# EAGLE board Tilty Omni (EAGLE 6.5.0)
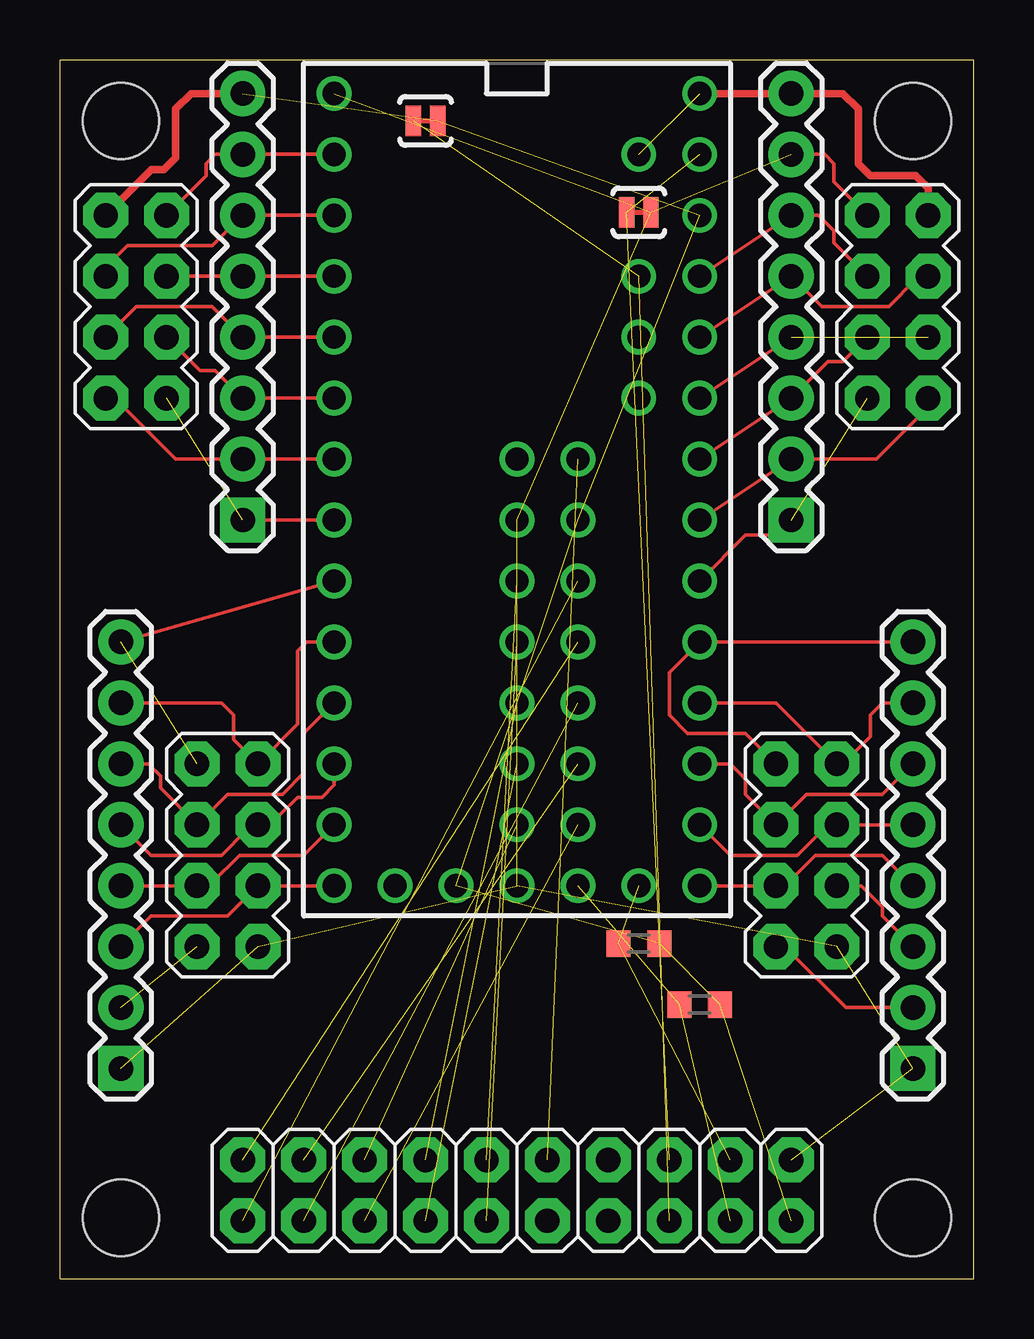
[diagram p0: board, top side]

Size 38.1 x 50.8 mm. Coordinates in mm from the lower left corner, seen from the top.
Outline: 0,0 38.1,0 38.1,50.8 0,50.8 0,0
Copper layers (1*16): Top 0.0356mm / dielectric 1.5011mm / Bottom 0.0356mm
Design rules "LaenPCBOrder": minimum track width 6mil, minimum drill 13mil, track to track 6mil, track to pad 6mil, pad to pad 6mil, via to via 6mil, smd to smd 6mil, copper to edge 15mil, drill to drill 6mil, minimum pad ring 7mil, minimum via ring 7mil, stop-mask expansion 4mil, vias tented up to drill 0mil, thermal gap 10mil
Holes 3.17 mm at 35.56,48.26 35.56,2.54 2.54,2.54 2.54,48.26

## Footprints (pad centres in the part's own frame; a part is rotated, then mirrored left to right if it is on the bottom)
1X08 = drill 1.016 pad 1.88 square: 1 0,0 | drill 1.016 pad 1.88: 2 2.54,0; 3 5.08,0; 4 7.62,0; 5 10.16,0; 6 12.7,0; 7 15.24,0; 8 17.78,0
2X4 = drill 1.016 pad 1.88 octagon: 1 -3.81,-1.27; 2 -3.81,1.27; 3 -1.27,-1.27; 4 -1.27,1.27; 5 1.27,-1.27; 6 1.27,1.27; 7 3.81,-1.27; 8 3.81,1.27
2X10 = drill 1.016 pad 1.88 octagon: 1 -11.43,-1.27; 2 -11.43,1.27; 3 -8.89,-1.27; 4 -8.89,1.27; 5 -6.35,-1.27; 6 -6.35,1.27; 7 -3.81,-1.27; 8 -3.81,1.27; 9 -1.27,-1.27; 10 -1.27,1.27; 11 1.27,-1.27; 12 1.27,1.27; 13 3.81,-1.27; 14 3.81,1.27; 15 6.35,-1.27; 16 6.35,1.27; 17 8.89,-1.27; 18 8.89,1.27; 19 11.43,-1.27; 20 11.43,1.27
R0603 = smd 1 x 1.1: 1 -0.85,0; 2 0.85,0
SJ_2S-TRACE = smd 0.635 x 1.27: 1 -0.508,0; 2 0.508,0
TEENSY_3.0_ALLPINS = drill 0.965: 0 -7.62,13.97; 1 -7.62,11.43; 2 -7.62,8.89; 3 -7.62,6.35; 3.3V 7.62,11.43; 3.3V1 -2.54,-16.51; 3.3V2 2.54,-1.27; 4 -7.62,3.81; 5 -7.62,1.27; 6 -7.62,-1.27; 7 -7.62,-3.81; 8 -7.62,-6.35; 9 -7.62,-8.89; 10 -7.62,-11.43; 11 -7.62,-13.97; 12 -7.62,-16.51; 13 7.62,-16.51; 14/A0 7.62,-13.97; 15/A1 7.62,-11.43; 16/A2 7.62,-8.89; 17/A3 7.62,-6.35; 18/A4 7.62,-3.81; 19/A5 7.62,-1.27; 20/A6 7.62,1.27; 21/A7 7.62,3.81; 22/A8 7.62,6.35; 23/A9 7.62,8.89; 24 0,-3.81; 25 0,-6.35; 26 0,-8.89; 27 0,-11.43; 28 0,-13.97; 29 2.54,-13.97; 30 2.54,-11.43; 31 2.54,-8.89; 32 2.54,-6.35; 33 2.54,-3.81; A10 5.08,6.35; A11 5.08,3.81; A12 0,1.27; A13 2.54,1.27; AGND 7.62,13.97; AREF 5.08,8.89; GND -7.62,16.51; GND1 0,-16.51; GND2 0,-1.27; PGM 2.54,-16.51; RESET 5.08,-16.51; VBAT -5.08,-16.51; VIN 7.62,16.51; VUSB 5.08,13.97

## Placement (x,y rotation side)
JP1  [1X08]  7.62,31.62 90 top
JP2  [1X08]  2.54,8.76 90 top
JP3  [1X08]  35.56,8.76 90 top
JP4  [1X08]  30.48,31.62 90 top
JP5  M04X2  [2X4]  3.17,40.51 270 top
JP6  M04X2  [2X4]  6.99,17.65 270 top
JP7  M04X2  [2X4]  31.11,17.65 270 top
JP8  M04X2  [2X4]  34.92,40.51 270 top
JP10  M10X2  [2X10]  19.05,3.68 0 top
R1  10k  [R0603]  26.67,11.43 0 top
R2  10k  [R0603]  24.13,13.97 0 top
SJ1  SOLDERJUMPERTRACE  [SJ_2S-TRACE]  24.13,44.45 0 top
SJ2  SOLDERJUMPERTRACE  [SJ_2S-TRACE]  15.24,48.26 0 top
U1  TEENSY_3.0_ALLPINS  [TEENSY_3.0_ALLPINS]  19.05,32.89 0 top

## Library data of the parts
JP1-JP8 JP10 = SparkFun-Connectors
R1 R2 = resistor
SJ1 SJ2 = SparkFun-Passives
U1 = Teensy3.0

## Nets
3V_SCL: JP4.2 JP8.8 U1.19/A5
3V_SDA: JP4.1 JP8.7 U1.18/A4
5V_SCL: JP3.7 JP7.2 U1.16/A2
5V_SDA: JP3.8 JP7.1 U1.17/A3
7: JP2.8 JP6.1 U1.7
8: JP2.7 JP6.2 U1.8
9: JP2.6 JP6.3 U1.9
10: JP2.5 JP6.4 U1.10
20: JP4.3 JP8.5 U1.20/A6
21: JP4.4 JP8.6 U1.21/A7
24: JP10.10 U1.24
25: JP10.9 U1.25
26: JP10.8 U1.26
27: JP10.7 U1.27
28: JP10.6 U1.28
29: JP10.5 U1.29
30: JP10.4 U1.30
31: JP10.3 U1.31
32: JP10.2 U1.32
33: JP10.1 U1.33
+3V3: JP1.8 JP5.1 JP10.19 R1.2 R2.2 SJ2.2 U1.3.3V U1.3.3V1 U1.3.3V2
+5V: JP4.8 JP8.2 U1.VIN U1.VUSB
A10: JP10.13
A11: JP10.14
A12: JP10.11
A13: JP10.12 U1.A13
AGND: JP10.16 SJ1.1 U1.AGND
AREF: JP10.15 SJ2.1 U1.AREF
AUX_SCL: JP3.2 JP7.7
AUX_SDA: JP3.3 JP7.6
BATT_SENSE: JP3.5 JP7.4 U1.14/A0
BLUETOOTH_RX: JP1.7 JP5.2 U1.0
BLUETOOTH_TX: JP1.6 JP5.3 U1.1
BT_CMD: JP3.6 JP7.3 U1.15/A1
GND: JP2.1 JP3.1 JP4.7 JP6.8 JP7.8 JP8.1 JP10.20 SJ1.2 U1.GND U1.GND1 U1.GND2
IMU_INT: JP1.2 JP5.7 U1.5
MEMORY_CS: JP1.1 JP5.8 U1.6
MISO: JP2.3 JP6.6 U1.12
MOSI: JP2.4 JP6.5 U1.11
N$11: U1.A10
N$12: U1.A11
N$13: U1.A12
N$17: U1.VBAT
PGM: JP10.17 R1.1 U1.PGM
RESET: JP10.18 R2.1 U1.RESET
SCK: JP3.4 JP7.5 U1.13
SERVO_1: JP1.5 JP5.4 U1.2
SERVO_2: JP1.4 JP5.5 U1.3
SERVO_3: JP4.5 JP8.4 U1.22/A8
SERVO_4: JP4.6 JP8.3 U1.23/A9
USB_CS: JP1.3 JP5.6 U1.4
VCC: JP2.2 JP6.7

## Tracks (layer width: path | path; a pad name or v marks a point on that pad's centre or on a via)
3V_SCL
  Top 0.152: U1.19/A5 JP4.2 34.04,34.16 36.2,36.32 JP8.8
3V_SDA  (1 unrouted)
  Top 0.152: U1.18/A4 28.57,30.99 29.84,30.99 JP4.1
5V_SCL
  Top 0.152: U1.16/A2 29.84,24 JP7.2 32.64,21.46 33.78,22.61 33.78,23.5 34.29,24 JP3.7
5V_SDA
  Top 0.152: JP7.1 28.57,22.73 26.16,22.73 25.4,23.5 25.4,25.27 U1.17/A3 JP3.8
7  (1 unrouted)
  Top 0.152: JP2.8 U1.7
8
  Top 0.152: U1.8 10.29,26.54 9.91,26.16 9.91,23.11 JP6.2 7.24,22.48 7.24,23.5 6.73,24 JP2.7
9
  Top 0.152: U1.9 10.16,22.73 10.16,21.08 9.27,20.19 6.99,20.19 JP6.3 4.19,20.45 4.19,20.95 3.68,21.46 JP2.6
10
  Top 0.152: U1.10 11.43,20.57 10.92,20.07 9.91,20.07 9.14,19.3 8.64,19.3 JP6.4 8,18.67 7.75,18.67 6.73,17.65 3.81,17.65 JP2.5
20
  Top 0.152: U1.20/A6 JP4.3 32,38.23 32.64,38.23 JP8.5
21  (1 unrouted)
  Top 0.152: U1.21/A7 JP4.4
24  (1 unrouted)
25  (1 unrouted)
26  (1 unrouted)
27  (1 unrouted)
28  (1 unrouted)
29  (1 unrouted)
30  (1 unrouted)
31  (1 unrouted)
32  (1 unrouted)
33  (1 unrouted)
+3V3  (7 unrouted)
  Top 0.305: JP1.8 5.46,49.4 4.83,48.77 4.83,46.74 4.32,46.23 3.81,46.23 JP5.1
+5V  (1 unrouted)
  Top 0.305: U1.VIN JP4.8 32.64,49.4 33.27,48.77 33.27,46.48 33.78,45.97 35.69,45.97 36.2,45.47 JP8.2
A13  (1 unrouted)
AGND  (2 unrouted)
AREF  (2 unrouted)
AUX_SCL
  Top 0.152: JP3.2 32.77,11.3 30.35,13.72 29.97,13.72 JP7.7
AUX_SDA
  Top 0.152: JP7.6 33.4,16.38 34.29,15.49 34.29,15.11 JP3.3
BATT_SENSE
  Top 0.152: U1.14/A0 27.94,17.65 30.73,17.65 31.88,18.8 32.26,18.8 JP7.4 JP3.5
BLUETOOTH_RX
  Top 0.152: U1.0 JP1.7 6.48,46.86 6.1,46.48 6.1,45.97 JP5.2
BLUETOOTH_TX
  Top 0.152: U1.1 JP1.6 6.35,43.05 2.79,43.05 1.91,42.16 JP5.3
BT_CMD
  Top 0.152: U1.15/A1 27.94,21.46 28.57,20.83 28.57,20.19 JP7.3 31.11,20.19 34.29,20.19 JP3.6
GND  (9 unrouted)
  Top 0.152: JP4.7 31.88,46.86 32.26,46.48 32.26,45.72 JP8.1
IMU_INT
  Top 0.152: U1.5 JP1.2 4.83,34.16 2.29,36.7 JP5.7
MEMORY_CS  (1 unrouted)
  Top 0.152: JP1.1 U1.6
MISO
  Top 0.152: U1.12 JP6.6 6.99,15.11 3.81,15.11 JP2.3
MOSI
  Top 0.152: JP2.4 JP6.5 5.84,16.51 6.35,16.51 7.49,17.65 10.16,17.65 U1.11
PGM  (2 unrouted)
RESET  (2 unrouted)
SCK
  Top 0.152: U1.13 JP7.5 30.23,16.38 31.5,17.65 34.29,17.65 JP3.4
SERVO_1
  Top 0.152: U1.2 JP1.5 JP5.4
SERVO_2
  Top 0.152: U1.3 JP1.4 6.35,40.51 3.17,40.51 JP5.5
SERVO_3
  Top 0.152: U1.22/A8 JP4.5 31.75,40.51 34.54,40.51 35.69,41.66 36.07,41.66 JP8.4
SERVO_4
  Top 0.152: U1.23/A9 JP4.6 31.62,44.32 32.26,43.69 32.26,43.18 JP8.3
USB_CS
  Top 0.152: U1.4 JP1.3 6.48,37.85 5.84,37.85 JP5.6
VCC  (1 unrouted)

## Text on the board
tNames: IMU